# Allegro board PCB_ZANFIRA_DAN.brd
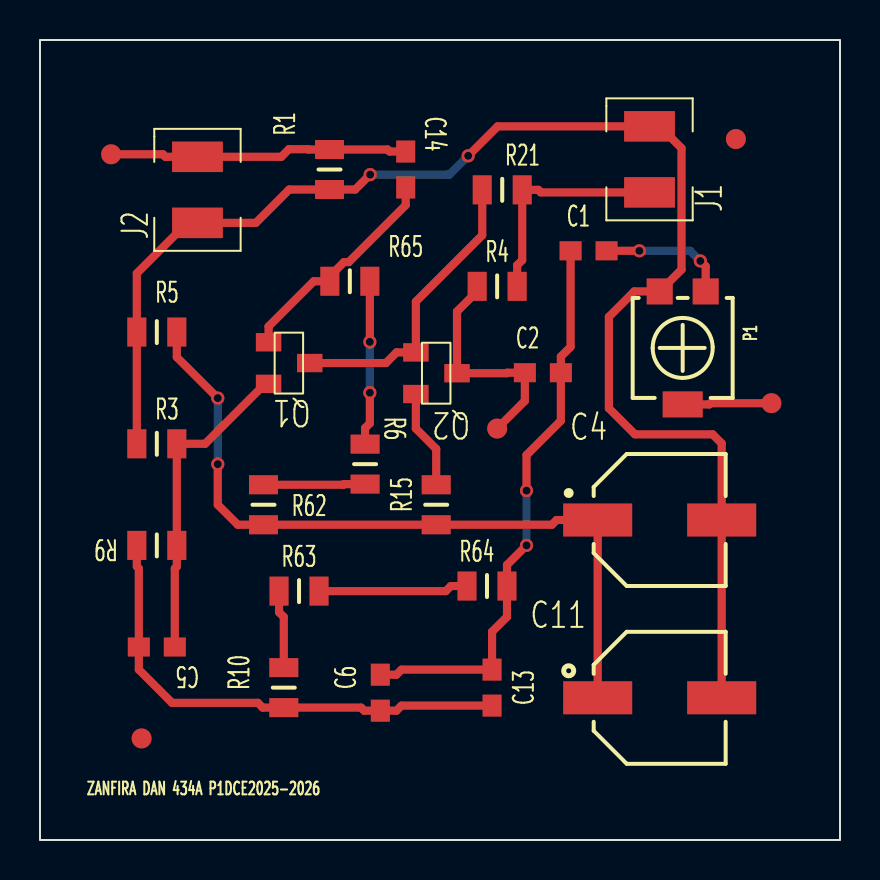
[diagram p0: board, top side]
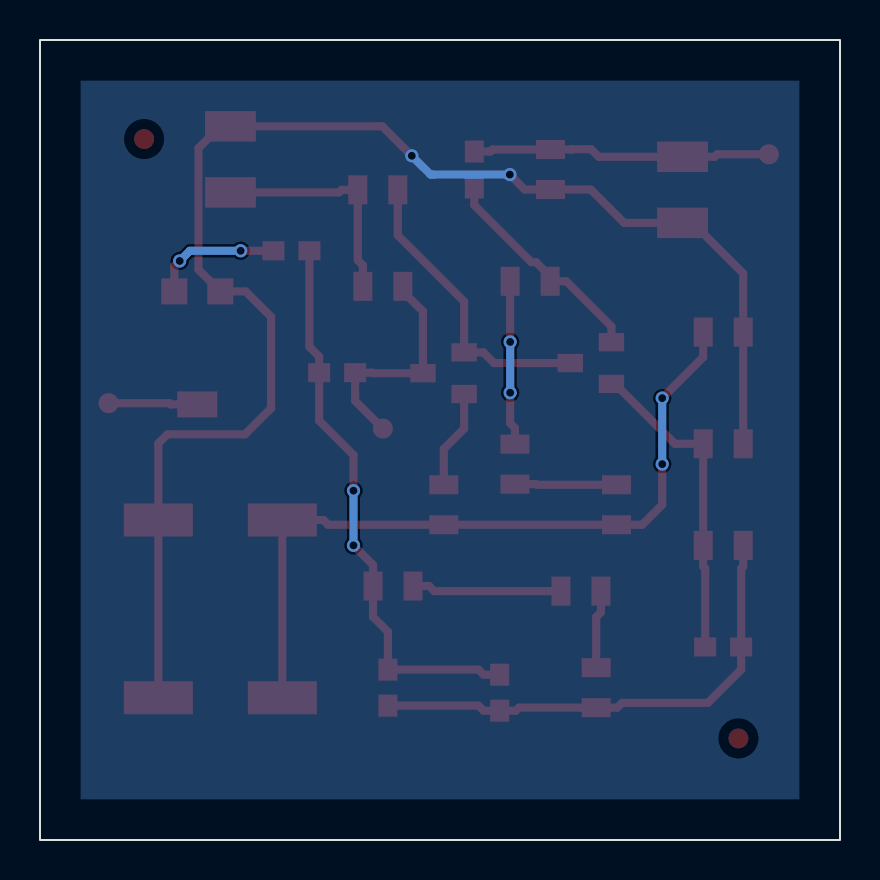
[diagram p1: board, bottom side, seen from below]

Outline 40.01 x 40.01 mm; copper layers: TOP, BOTTOM. Coordinates in mm from the lower left corner of the outline.
Outline path: rectangle 0,0 40.01,40.01

## Design rules (mm)
constraint set DEFAULT: min track width 0.406

## Placement (name value [footprint] x y rotation side)
C1  4.7u  [CAPC2008X126N_0805]  27.43 29.46 0 top
C2  4.7u  [CAPC2008X126N_0805]  25.15 23.37 0 top
C4  10u  [CAPAE660X770N]  30.99 16 0 top
C5  1n  [CAPC2008X126N_0805]  5.84 9.65 180 top
C6  2.2n  [CAPC2008X126N_0805]  17.02 7.37 90 top
C11  10u  [CAPAE660X770N]  30.99 7.11 0 top
C13  1n  [CAPC2008X126N_0805]  22.61 7.62 90 top
C14  4.7u  [CAPC2008X126N_0805]  18.29 33.53 270 top
J1  CON2  [1210RF_WV_12D]  30.48 34.04 90 top
J2  CON2  [1210RF_WV_12D]  7.87 32.51 90 top
NOREF  -  [unnamed]  5.08 5.08 0 top
NOREF#2  -  [unnamed]  34.8 35.05 0 top
NOREF#3  -  [#2]  40.01 0 90 top
NOREF#4  -  [#2]  0 0 0 top
P1  50K  [TS53YL]  30.99 27.43 90 top
Q1  BC846B  [TO236AB]  11.43 24.89 180 top
Q2  BC846B  [TO236AB]  18.8 24.38 180 top
R1  47k  [RES2012X50N_0805]  14.48 33.53 90 top
R3  1k  [RES2012X50N_0805]  5.84 19.81 0 top
R4  15k  [RES2012X50N_0805]  22.86 27.69 0 top
R5  1k  [RES2012X50N_0805]  5.84 25.4 0 top
R6  330k  [RES2012X50N_0805]  16.26 18.8 270 top
R9  68K  [RES2012X50N_0805]  5.84 14.73 180 top
R10  510k  [RES2012X50N_0805]  12.19 7.62 90 top
R15  1  [RES2012X50N_0805]  19.81 16.76 90 top
R21  220k  [RES2012X50N_0805]  23.11 32.51 0 top
R62  15k  [RES2012X50N_0805]  11.18 16.76 270 top
R63  220k  [RES2012X50N_0805]  12.95 12.45 0 top
R64  100k  [RES2012X50N_0805]  22.35 12.7 0 top
R65  15k  [RES2012X50N_0805]  15.49 27.94 0 top
TP1  CON1  [TP100]  3.56 34.29 0 top
TP2  CON1  [TP100]  36.58 21.84 0 top
TP3  CON1  [TP100]  22.86 20.57 0 top

## Library data of the parts
C1 C2 C5 C6 C13 C14 = C
C4 C11 = C_elect_0
J1 J2 = CON2
P1 = POT
Q1 Q2 = BC846B
R1 R3-R6 R9 R10 R15 R21 R62-R65 = R
TP1-TP3 = CON1

## Footprints (pads in the part's own frame, mm; a bottom-side part is the same pattern mirrored in y, then rotated)
1210RF_WV_12D
  rect 1.524x2.54 smd: 1(-1.651,0) 2(1.651,0)
CAPAE660X770N
  rect 3.45x1.65 smd: 1(-3.1,0) 2(3.1,0)
CAPC2008X126N_0805
  rect 1.1x0.95 smd: 1(-0.9,0) 2(0.9,0)
RES2012X50N_0805
  rect 0.95x1.45 smd: 1(-1,0) 2(1,0)
TO236AB
  rect 1.27x0.914 smd: 1(0,0) 2(0,2.083) 3(-2.057,1.041)
TP100
  round 1 smd: 1(0,0)
TS53YL
  rect 1.3x1.3 smd: 1(0,0) 3(0,-2.3)
  rect 1.3x2 smd: 2(-5.65,-1.15)
unnamed
  round 1 smd: (0,0)

## Nets
VCC: J1.1 R4.2 R21.2
VIN: C14.1 J2.2 R1.2 TP1.1
0: C4.2(-) C11.2(-) J1.2 J2.1 P1.1 R1.1 R3.1 R5.1
N16455: C2.1 Q2.3 R4.1 TP3.1
N16519: Q1.3 Q2.1 R21.1
N16533: C1.1 C2.2 C6.2 C13.2 R64.2
N16547: C1.2 P1.3
N16599: Q2.2(E) R15.2
N16651: C14.2 Q1.1 R65.1
N16661: C5.1 Q1.2(E) R3.2 R9.1
N16665: C4.1 C11.1 R5.2 R15.1 R62.2
N16831: R6.1 R65.2
N17177: C5.2 C6.1 C13.1 R9.2 R10.1
N17191: R10.2 R63.1
N17197: R63.2 R64.1
N21594: P1.2(T) TP2.1
N167650: R6.2 R62.1

## Via types
v1: diameter 0.66, hole 0.4, TOP to BOTTOM, 10 vias

## Routing (per net, layer and track width the routed paths; a pad name or vN(x,y) marks a point on that pad's centre or on a via; arc(x,y) is an arc through that point)
VCC: length 11.3
  TOP w0.406: R4.2 23.86,28.74 24.11,29 R21.2 24.92,32.51 25.05,32.38 J1.1
VIN: length 15
  TOP w0.406: C14.1 17.48,34.43 17.38,34.53 R1.2 13.42,34.53 13.41,34.54 12.45,34.54 12.06,34.16 J2.2 6.27,34.16 6.15,34.29 TP1.1
0: length 73.6
  TOP w0.406: C11.2 C4.2 34.09,19.83 33.63,20.29 29.75,20.29 28.45,21.59 28.45,26.16 29.72,27.43 P1.1 32.08,28.52 32.08,34.59 30.99,35.69 J1.2 22.89,35.69 v1(21.41,34.21) ; v1(16.51,33.27) 15.76,32.53 R1.1 12.46,32.53 10.79,30.86 J2.1 7.37,30.86 4.84,28.34 R5.1 R3.1
  BOTTOM w0.406: v1(21.41,34.21) 20.47,33.27 v1(16.51,33.27)
N16455: length 11.5
  TOP w0.406: R4.1 21.86,27.44 20.85,26.43 Q2.3 23.34,23.34 23.37,23.37 C2.1 24.25,21.96 TP3.1
N16519: length 15
  TOP w0.406: R21.1 22.11,30.24 18.8,26.92 Q2.1 17.83,24.38 17.3,23.85 Q1.3
N16533: length 28.3
  TOP w0.406: v1(24.33,17.47) 24.33,19.25 26.05,20.97 C2.2 26.05,24.17 26.53,24.66 C1.1 ; v1(24.33,14.73) 23.35,13.76 R64.2 23.35,11.16 22.61,10.41 C13.2 18.08,8.52 17.82,8.27 C6.2
  BOTTOM w0.406: v1(24.33,14.73) v1(24.33,17.47)
N16547: length 6.5
  TOP w0.406: C1.2 v1(29.97,29.46) ; P1.3 33.29,28.69 v1(33.02,28.96)
  BOTTOM w0.406: v1(33.02,28.96) 32.51,29.46 v1(29.97,29.46)
N16599: length 5
  TOP w0.406: Q2.2 18.8,20.57 19.81,19.56 R15.2
N16651: length 11.2
  TOP w0.406: Q1.1 11.43,25.68 13.69,27.94 R65.1 14.49,28.19 15.2,28.9 15.44,28.9 18.29,31.75 C14.2
N16661: length 16
  TOP w0.406: C5.1 6.74,13.58 6.84,13.68 R9.1 R3.2 8.26,19.81 11.25,22.81 Q1.2
N16665: length 37.9
  TOP w0.406: R5.2 6.84,24.15 v1(8.89,22.1) ; v1(8.89,18.8) 8.89,16.76 9.89,15.76 R62.2 R15.1 25.59,15.76 25.83,16 C4.1 C11.1
  BOTTOM w0.406: v1(8.89,18.8) v1(8.89,22.1)
N16831: length 8.2
  TOP w0.406: v1(16.49,22.37) 16.49,20.84 16.26,20.6 R6.1 ; R65.2 v1(16.49,24.91)
  BOTTOM w0.406: v1(16.49,24.91) v1(16.49,22.37)
N17177: length 24.9
  TOP w0.406: C13.1 18.08,6.72 17.82,6.47 C6.1 16.21,6.47 16.06,6.62 R10.1 11.14,6.62 10.9,6.86 6.6,6.86 4.94,8.52 C5.2 4.94,13.58 4.84,13.68 R9.2
N17191: length 3.9
  TOP w0.406: R10.2 12.19,11.15 11.95,11.39 R63.1
N17197: length 7.5
  TOP w0.406: R63.2 20.29,12.45 20.55,12.7 R64.1
N21594: length 4.5
  TOP w0.406: P1.2 33.47,21.78 33.53,21.84 TP2.1
N167650: length 5.1
  TOP w0.406: R62.1 15.17,17.76 15.2,17.8 R6.2

## Copper pours and planes (outline as drawn; the poured copper is in the pictures)
0 on BOTTOM: 2.03,2.03 2.03,37.97 37.97,37.97 37.97,2.03

## Text on the board
Ref Des/Silkscreen Top: ZANFIRA DAN 434A P1DCE2025-2026
XSECTION_CHART: *  SURFACE | L1 TOP CONDUCTOR | *  DIELECTRIC | L2 BOTTOM CONDUCTOR | DESIGN CROSS SECTION CHART | ___________________________ | TOTAL THICKNESS 63 MIL | 1-2
DEVICE_TYPE_TOP: FIGURE | FINISHED_SIZE | 15.75 | BY LAYER: TOP to BOTTOM | ALL UNITS ARE IN MILS | PLATED | QTY | 10
